# EAGLE board CT_schematic (EAGLE 7.6.0)

Size 100 x 80 mm. Coordinates in mm from the lower left corner, seen from the top.
Outline: 0,0 100,0 100,80 0,80 0,0
Copper layers (1*16): Top 0.035mm / dielectric 1.5mm / Bottom 0.035mm
Design rules "default": minimum track width 10mil, minimum drill 24mil, track to track 8mil, track to pad 8mil, pad to pad 8mil, via to via 8mil, smd to smd 8mil, copper to edge 40mil, drill to drill 8mil, minimum pad ring 10mil, minimum via ring 8mil, stop-mask expansion 4mil, vias tented up to drill 0mil, thermal gap 10mil

## Footprints (pad centres in the part's own frame; a part is rotated, then mirrored left to right if it is on the bottom)
C0603 = smd 0.8 x 0.8: 1 -0.762,0; 2 0.762,0
C0402 = smd 0.5 x 0.5: 1 -0.508,0; 2 0.508,0
EXV-9B = smd 2.718 x 1.778: 1 -2.108,0; 2 2.108,0
EXV-9H = smd 3.505 x 1.676: 1 -2.857,0; 2 2.857,0
L0603 = smd 0.8 x 0.8: 1 -0.762,0; 2 0.762,0
PJ-037B_PACKAGE = drill 3.7 square: 1 12,0 | drill 3.2 square: 2 6,0
R0603 = smd 0.8 x 0.8: 1 -0.762,0; 2 0.762,0
LQFP144 = smd 0.35 x 1.35: 1 -8.75,-10.625; 2 -8.25,-10.625; 3 -7.75,-10.625; 4 -7.25,-10.625; 5 -6.75,-10.625; 6 -6.25,-10.625; 7 -5.75,-10.625; 8 -5.25,-10.625; 9 -4.75,-10.625; 10 -4.25,-10.625; 11 -3.75,-10.625; 12 -3.25,-10.625; 13 -2.75,-10.62; 14 -2.25,-10.625; 15 -1.75,-10.625; 16 -1.25,-10.625; 17 -0.75,-10.625; 18 -0.25,-10.625; 19 0.25,-10.625; 20 0.75,-10.625; 21 1.25,-10.625; 22 1.75,-10.625; 23 2.25,-10.625; 24 2.75,-10.62; 25 3.25,-10.625; 26 3.75,-10.625; 27 4.25,-10.625; 28 4.75,-10.625; 29 5.25,-10.625; 30 5.75,-10.625; 31 6.25,-10.625; 32 6.75,-10.625; 33 7.25,-10.625; 34 7.75,-10.625; 35 8.25,-10.625; 36 8.75,-10.625; 73 8.75,10.625; 74 8.25,10.625; 75 7.75,10.625; 76 7.25,10.625; 77 6.75,10.625; 78 6.25,10.625; 79 5.75,10.625; 80 5.25,10.625; 81 4.75,10.625; 82 4.25,10.625; 83 3.75,10.625; 84 3.25,10.625; 85 2.75,10.625; 86 2.25,10.625; 87 1.75,10.625; 88 1.25,10.625; 89 0.75,10.625; 90 0.25,10.625; 91 -0.25,10.625; 92 -0.75,10.625; 93 -1.25,10.625; 94 -1.75,10.625; 95 -2.25,10.625; 96 -2.75,10.625; 97 -3.25,10.625; 98 -3.75,10.625; 99 -4.25,10.625; 100 -4.75,10.625; 101 -5.25,10.625; 102 -5.75,10.625; 103 -6.25,10.625; 104 -6.75,10.625; 105 -7.25,10.625; 106 -7.75,10.625; 107 -8.25,10.625; 108 -8.75,10.625 | smd 1.35 x 0.35: 37 10.625,-8.75; 38 10.625,-8.25; 39 10.625,-7.75; 40 10.625,-7.25; 41 10.625,-6.75; 42 10.625,-6.25; 43 10.625,-5.75; 44 10.625,-5.25; 45 10.625,-4.75; 46 10.625,-4.25; 47 10.625,-3.75; 48 10.625,-3.25; 49 10.625,-2.75; 50 10.625,-2.25; 51 10.625,-1.75; 52 10.625,-1.25; 53 10.625,-0.75; 54 10.625,-0.25; 55 10.625,0.25; 56 10.625,0.75; 57 10.625,1.25; 58 10.625,1.75; 59 10.625,2.25; 60 10.625,2.75; 61 10.625,3.25; 62 10.625,3.75; 63 10.625,4.25; 64 10.625,4.75; 65 10.625,5.25; 66 10.625,5.75; 67 10.625,6.25; 68 10.625,6.75; 69 10.625,7.25; 70 10.625,7.75; 71 10.625,8.25; 72 10.625,8.75; 109 -10.625,8.75; 110 -10.625,8.25; 111 -10.625,7.75; 112 -10.625,7.25; 113 -10.625,6.75; 114 -10.625,6.25; 115 -10.625,5.75; 116 -10.625,5.25; 117 -10.625,4.75; 118 -10.625,4.25; 119 -10.625,3.75; 120 -10.625,3.25; 121 -10.625,2.75; 122 -10.625,2.25; 123 -10.625,1.75; 124 -10.625,1.25; 125 -10.625,0.75; 126 -10.625,0.25; 127 -10.625,-0.25; 128 -10.625,-0.75; 129 -10.625,-1.25; 130 -10.625,-1.75; 131 -10.625,-2.25; 132 -10.625,-2.75; 133 -10.625,-3.25; 134 -10.625,-3.75; 135 -10.625,-4.25; 136 -10.625,-4.75; 137 -10.625,-5.25; 138 -10.625,-5.75; 139 -10.625,-6.25; 140 -10.625,-6.75; 141 -10.625,-7.25; 142 -10.625,-7.75; 143 -10.625,-8.25; 144 -10.625,-8.75
SOIC-8 = smd 1.6 x 0.6: 1 -2.7,1.905 | smd 1.55 x 0.6: 2 -2.7,0.635; 3 -2.7,-0.635; 4 -2.7,-1.905; 5 2.7,-1.905; 6 2.7,-0.635; 7 2.7,0.635; 8 2.7,1.905
SAMTEC_FTSH-105-01-L-DV-K = smd 0.762 x 2.794: 1 -2.54,-2.032; 2 -2.54,2.032; 3 -1.27,-2.032; 4 -1.27,2.032; 5 0,-2.032; 6 0,2.032; 7 1.27,-2.032; 8 1.27,2.032; 9 2.54,-2.032; 10 2.54,2.032
DFN8-S = smd 0.6 x 0.4: 1 -2.69,1.905; 2 -2.69,0.635; 3 -2.69,-0.635; 4 -2.69,-1.905; 5 2.69,-1.905; 6 2.69,-0.635; 7 2.69,0.635; 8 2.69,1.905
DFN-6 = smd 0.805 x 0.3: 1 -0.952,0.5; 2 -0.952,0; 3 -0.952,-0.5; 4 0.952,-0.5; 5 0.952,0; 6 0.952,0.5 | smd 0.61 x 1.42: 7 0,0
ABS07-32.768KHZ-7-T = smd 1.1 x 2.4: 1 -2.5,0; 2 0,0
ABLS-25.000MHZ-B2F-T = smd 5.6 x 2.8: 1 -3.81,0; 2 5.69,0
LP2954 = smd 1.6 x 0.6: 1 -2.475,1.905 | smd 1.55 x 0.6: 2 -2.475,0.635; 3 -2.475,-0.635; 4 -2.475,-1.905; 5 2.475,-1.905; 6 2.475,-0.635; 7 2.475,0.635; 8 2.475,1.905
SON-6 = smd 0.55 x 0.3: 1 -0.355,0.5 | smd 0.52 x 0.3: 2 -0.37,0; 3 -0.37,-0.5; 4 0.37,-0.5; 5 0.37,0; 6 0.37,0.5
SW_4-1437565-2 = smd 1.4 x 2.1: 1 -2.23,4.55; 2 -2.23,-4.55; 3 2.23,4.55; 4 2.23,-4.55
LGM67K-G1J2-24-Z = smd 0.8 x 1.4: A -2,0; C 0,0
NC7SZ125M5X = smd 1.3 x 0.7: 1 -1.3,0.95; 2 -1.3,0; 3 -1.3,-0.95; 4 1.3,-0.95; 5 1.3,0.95

## Placement (x,y rotation side)
C1  1e-07  [C0603]  -33.02,68.58 0 top  (outside the outline)
C2  1e-07  [C0603]  -36.83,68.58 0 top  (outside the outline)
C3  1e-07  [C0603]  -40.64,68.58 0 top  (outside the outline)
C4  1e-07  [C0603]  -44.45,68.58 0 top  (outside the outline)
C5  1e-07  [C0603]  -48.26,68.58 0 top  (outside the outline)
C6  1e-07  [C0603]  -52.07,68.58 0 top  (outside the outline)
C7  1e-07  [C0603]  -55.88,68.58 0 top  (outside the outline)
C8  1e-07  [C0603]  -59.69,68.58 0 top  (outside the outline)
C9  1e-07  [C0603]  -63.5,68.58 0 top  (outside the outline)
C10  1e-07  [C0603]  -67.31,68.58 0 top  (outside the outline)
C11  1e-07  [C0603]  -71.12,68.58 0 top  (outside the outline)
C12  4.7e-06  [C0603]  -29.21,68.58 0 top  (outside the outline)
C13  1e-07  [C0603]  -15.24,73.66 0 top  (outside the outline)
C14  1e-08  [C0603]  -19.05,73.66 0 top  (outside the outline)
C15  1e-06  [C0603]  -22.86,73.66 0 top  (outside the outline)
C16  1e-11  [C0402]  -57.15,73.66 0 top  (outside the outline)
C17  1e-11  [C0402]  -60.96,73.66 0 top  (outside the outline)
C18  1e-11  [C0402]  -64.77,73.66 0 top  (outside the outline)
C19  1e-11  [C0402]  -68.58,73.66 0 top  (outside the outline)
C20  1e-08  [C0402]  -15.24,78.74 0 top  (outside the outline)
C21  1e-07  [C0402]  -19.05,78.74 0 top  (outside the outline)
C22  1e-08  [C0402]  -22.86,78.74 0 top  (outside the outline)
C23  1e-07  [C0402]  -26.67,78.74 0 top  (outside the outline)
C24  1e-06  [EXV-9B]  -16.51,57.15 0 top  (outside the outline)
C25  2.2e-06  [EXV-9B]  -25.4,57.15 0 top  (outside the outline)
C26  1e-07  [C0402]  -30.48,78.74 0 top  (outside the outline)
C27  0.0001  [EXV-9H]  -52.07,41.91 0 top  (outside the outline)
C28  0.0001  [EXV-9H]  -63.5,41.91 0 top  (outside the outline)
C29  1e-08  [C0402]  -34.29,78.74 0 top  (outside the outline)
C30  1e-08  [C0402]  -38.1,78.74 0 top  (outside the outline)
F1  240.0  [L0603]  -26.67,73.66 0 top  (outside the outline)
J1  PJ-037B  [PJ-037B_PACKAGE]  -27.94,30.48 0 top  (outside the outline)
R2  1000.0  [R0603]  -30.48,73.66 0 top  (outside the outline)
R4  4700.0  [R0603]  -34.29,73.66 0 top  (outside the outline)
R5  2200.0  [R0603]  -38.1,73.66 0 top  (outside the outline)
R6  2200.0  [R0603]  -41.91,73.66 0 top  (outside the outline)
R7  2200.0  [R0603]  -45.72,73.66 0 top  (outside the outline)
R8  2200.0  [R0603]  -49.53,73.66 0 top  (outside the outline)
R9  10000.0  [R0603]  -20.32,63.5 0 top  (outside the outline)
R10  10000.0  [R0603]  -25.4,63.5 0 top  (outside the outline)
R11  10000.0  [R0603]  -30.48,63.5 0 top  (outside the outline)
R12  10000.0  [R0603]  -35.56,63.5 0 top  (outside the outline)
R13  10000.0  [R0603]  -40.64,63.5 0 top  (outside the outline)
R14  10000.0  [R0603]  -45.72,63.5 0 top  (outside the outline)
R15  10000.0  [R0603]  -50.8,63.5 0 top  (outside the outline)
R16  10000.0  [R0603]  -55.88,63.5 0 top  (outside the outline)
R17  5.0  [R0603]  -53.34,73.66 0 top  (outside the outline)
R18  10000.0  [R0603]  -60.96,63.5 0 top  (outside the outline)
R19  10000.0  [R0603]  -66.04,63.5 0 top  (outside the outline)
R20  10000.0  [R0603]  -71.12,63.5 0 top  (outside the outline)
R21  100000.0  [R0603]  -52.07,57.15 0 top  (outside the outline)
R22  100000.0  [R0603]  -57.15,57.15 0 top  (outside the outline)
R23  101022.32  [R0603]  -46.99,57.15 0 top  (outside the outline)
R24  100000.0  [R0603]  -62.23,57.15 0 top  (outside the outline)
R25  10000.0  [R0603]  -15.24,68.58 0 top  (outside the outline)
R26  10000.0  [R0603]  -20.32,68.58 0 top  (outside the outline)
R27  18000.0  [R0603]  -25.4,68.58 0 top  (outside the outline)
R28  470000.0  [R0603]  -67.31,57.15 0 top  (outside the outline)
R29  120000.0  [R0603]  -15.24,63.5 0 top  (outside the outline)
U1  STM32L152ZCT6  [LQFP144]  -24.13,11.43 0 top  (outside the outline)
U2  AT25080B-SSHL-T  [SOIC-8]  -41.91,41.91 0 top  (outside the outline)
U3  FTSH-105-01-L-DV-K  [SAMTEC_FTSH-105-01-L-DV-K]  -58.42,7.62 0 top  (outside the outline)
U4  24AA512-I/MF  [DFN8-S]  -58.42,27.94 0 top  (outside the outline)
U5  SI7006-A20-IM  [DFN-6]  -41.91,77.47 0 top  (outside the outline)
U6  ABS07-32.768KHZ-7-T  [ABS07-32.768KHZ-7-T]  -49.53,50.8 0 top  (outside the outline)
U7  ABLS-25.000MHZ-B2F-T  [ABLS-25.000MHZ-B2F-T]  -26.67,50.8 0 top  (outside the outline)
U8  LP2954AIMX/NOPB  [LP2954]  -25.4,41.91 0 top  (outside the outline)
U9  TPS3895ADRYR  [SON-6]  -44.45,77.47 0 top  (outside the outline)
U10  4-1437565-2  [SW_4-1437565-2]  -44.45,29.21 0 top  (outside the outline)
U11  Q65110A2395  [LGM67K-G1J2-24-Z]  -58.42,49.53 0 top  (outside the outline)
U12  nc7sz125m5x  [NC7SZ125M5X]  -33.02,57.15 0 top  (outside the outline)
U13  nc7sz125m5x  [NC7SZ125M5X]  -39.37,57.15 0 top  (outside the outline)

## Library data of the parts
C1-C30 F1 J1 R2 R4-R29 U1-U13 = circuit_tree

## Nets
CLK_CRYSTAL_U1_8: C16.1 U1.8 U6.1
CLK_CRYSTAL_U1_9: C17.1 U1.9 U6.2
CLK_CRYSTAL_U1_23: C18.1 U1.23 U7.1
CLK_CRYSTAL_U1_24: C19.1 U1.24 U7.2
GND: C1.2 C2.2 C3.2 C4.2 C5.2 C6.2 C7.2 C8.2 C9.2 C10.2 C11.2 C12.2 C13.2 C14.2 C15.2 C16.2 C17.2 C18.2 C19.2 C20.2 C21.2 C22.2 C23.2 C24.2 C25.2 C26.2 C27.2 C28.2 C29.2 C30.2 J1.2 R2.2 R9.2 R16.2 R17.2 R19.2 R20.2 R24.2 R27.2 R29.2 U1.16 U1.30 U1.31 U1.38 U1.51 U1.61 U1.71 U1.83 U1.94 U1.107 U1.120 U1.130 U1.143 U2.4 U3.3 U3.5 U4.4 U5.2 U5.7 U8.4 U9.2 U11.C U12.2 U12.3 U13.1 U13.3
NET_U1_6: C13.1 U1.6
NET_U1_25: R4.1 U1.25 U13.4
NET_U1_33: C14.1 C15.1 F1.1 U1.32 U1.33
NET_U1_69: R7.1 U1.69 U4.6
NET_U1_70: R8.1 U1.70 U4.5
NET_U1_136: R5.1 U1.136 U5.6
NET_U1_137: R6.1 U1.137 U5.1
NET_U1_138: R9.1 U1.138
NET_U1_141: U11.A
NET_U1_142: U10.3 U10.4
NET_U2_3: R10.1 U2.3
NET_U2_7: R12.1 U2.7
NET_U3_9: R17.1 U3.9
NET_U4_1: R18.1 U4.1
NET_U4_2: R19.1 U4.2
NET_U4_3: R20.1 U4.3
NET_U8_3: R22.1 U8.3
NET_U8_5: R21.1 U8.5
NET_U8_7: R23.2 R24.1 U8.7
NET_U9_1: R26.1 R27.1 U9.1
NET_U9_3: R28.2 R29.1 U9.3
NET_U9_4: R25.1 U9.4 U12.4 U13.2
NET_U10_1: R2.1 U10.1 U10.2
PROC_SPI1_MISO: U1.42 U2.2
PROC_SPI1_MOSI: U1.43 U2.5
PROC_SPI1_NSS: R11.1 U1.40 U2.1
PROC_SPI1_SCK: U1.41 U2.6
PROC_SYS_JTCK_SWCLK: R16.1 U1.109 U3.4
PROC_SYS_JTDI: R14.1 U1.110 U3.8
PROC_SYS_JTDO_TRACESWO: U1.133 U3.6
PROC_SYS_JTMS_SWDIO: R15.1 U1.105 U3.2
RST_OUT_U3_JTAG_RST_B: R13.1 U3.10 U12.1
VCC_S1_15V3: C24.1 C27.1 C28.1 J1.1 R22.2 U8.8
VCC_TIER1_2V5: C1.1 C2.1 C3.1 C4.1 C5.1 C6.1 C7.1 C8.1 C9.1 C10.1 C11.1 C12.1 C20.1 C21.1 C22.1 C23.1 C25.1 C26.1 C29.1 C30.1 F1.2 R4.2 R5.2 R6.2 R7.2 R8.2 R10.2 R11.2 R12.2 R13.2 R14.2 R15.2 R18.2 R21.2 R23.1 R25.2 R26.2 R28.1 U1.17 U1.39 U1.52 U1.62 U1.72 U1.84 U1.95 U1.108 U1.121 U1.131 U1.144 U2.8 U3.1 U4.7 U4.8 U5.5 U8.1 U9.6 U12.5 U13.5

## Tracks (layer width: path | path; a pad name or v marks a point on that pad's centre or on a via)
CLK_CRYSTAL_U1_8  (2 unrouted)
CLK_CRYSTAL_U1_9  (2 unrouted)
CLK_CRYSTAL_U1_23  (2 unrouted)
CLK_CRYSTAL_U1_24  (2 unrouted)
GND  (65 unrouted)
NET_U1_6  (1 unrouted)
NET_U1_25  (2 unrouted)
NET_U1_33  (4 unrouted)
NET_U1_69  (2 unrouted)
NET_U1_70  (2 unrouted)
NET_U1_136  (2 unrouted)
NET_U1_137  (2 unrouted)
NET_U1_138  (1 unrouted)
NET_U1_142  (1 unrouted)
NET_U2_3  (1 unrouted)
NET_U2_7  (1 unrouted)
NET_U3_9  (1 unrouted)
NET_U4_1  (1 unrouted)
NET_U4_2  (1 unrouted)
NET_U4_3  (1 unrouted)
NET_U8_3  (1 unrouted)
NET_U8_5  (1 unrouted)
NET_U8_7  (2 unrouted)
NET_U9_1  (2 unrouted)
NET_U9_3  (2 unrouted)
NET_U9_4  (3 unrouted)
NET_U10_1  (2 unrouted)
PROC_SPI1_MISO  (1 unrouted)
PROC_SPI1_MOSI  (1 unrouted)
PROC_SPI1_NSS  (2 unrouted)
PROC_SPI1_SCK  (1 unrouted)
PROC_SYS_JTCK_SWCLK  (2 unrouted)
PROC_SYS_JTDI  (2 unrouted)
PROC_SYS_JTDO_TRACESWO  (1 unrouted)
PROC_SYS_JTMS_SWDIO  (2 unrouted)
RST_OUT_U3_JTAG_RST_B  (2 unrouted)
VCC_S1_15V3  (5 unrouted)
VCC_TIER1_2V5  (57 unrouted)